# Altium PCB PowerDivider.PcbDoc
Units mil, origin at the board's own origin, x right, y up, seen from the top; angles counter-clockwise.
Board outline 1139.75 x 1980.03 mil, 4 copper layers (Top Layer, Layer 1, Layer 2, Bottom Layer), stack 23.756 mil thick; 8 components, 2 nets, 31 pads, 131 vias.
Unrouted connection lines stored in the file: 8.
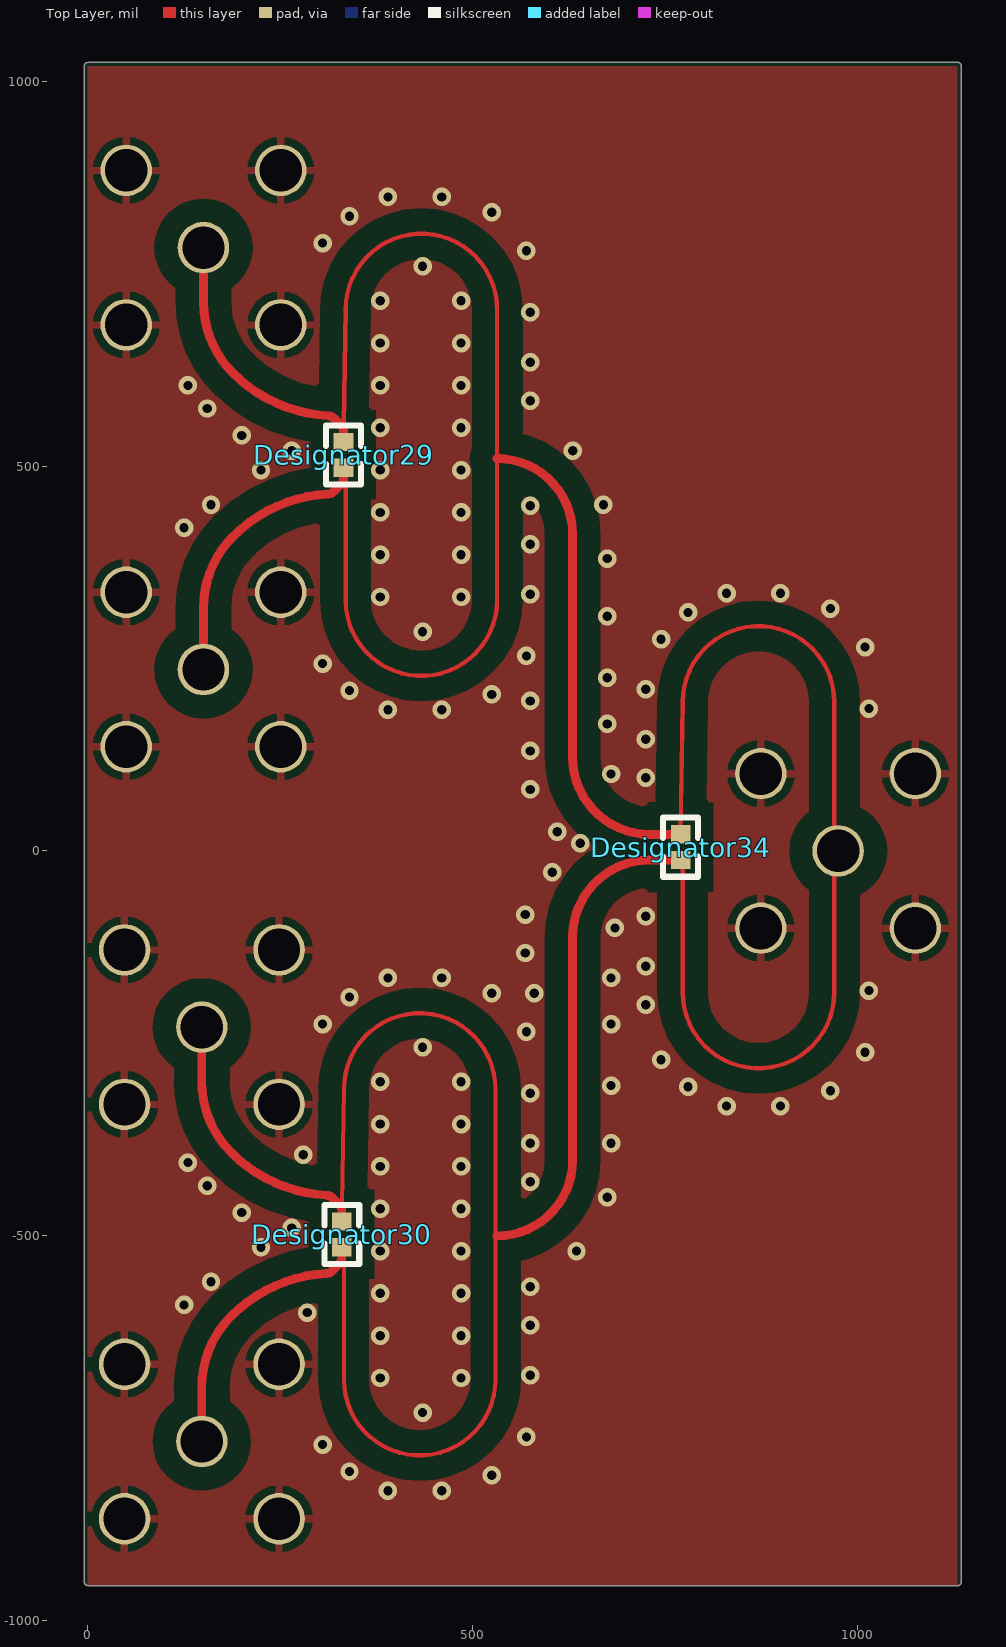
[diagram p0: Top Layer view]
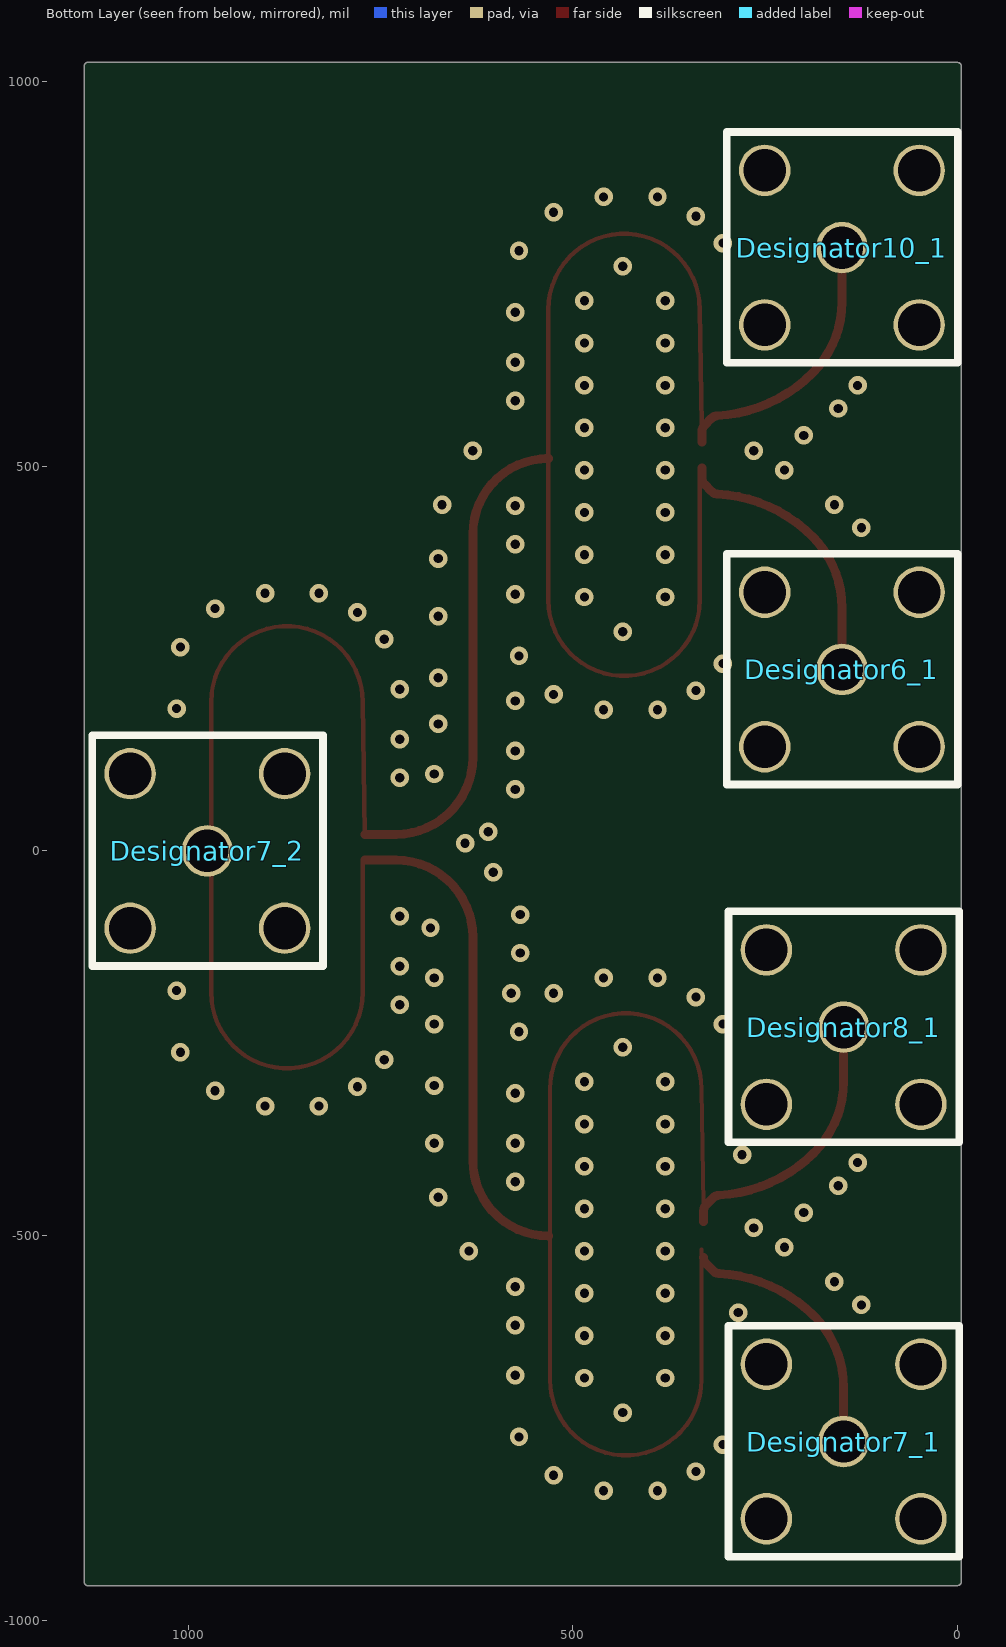
[diagram p1: Bottom Layer view, seen from below]
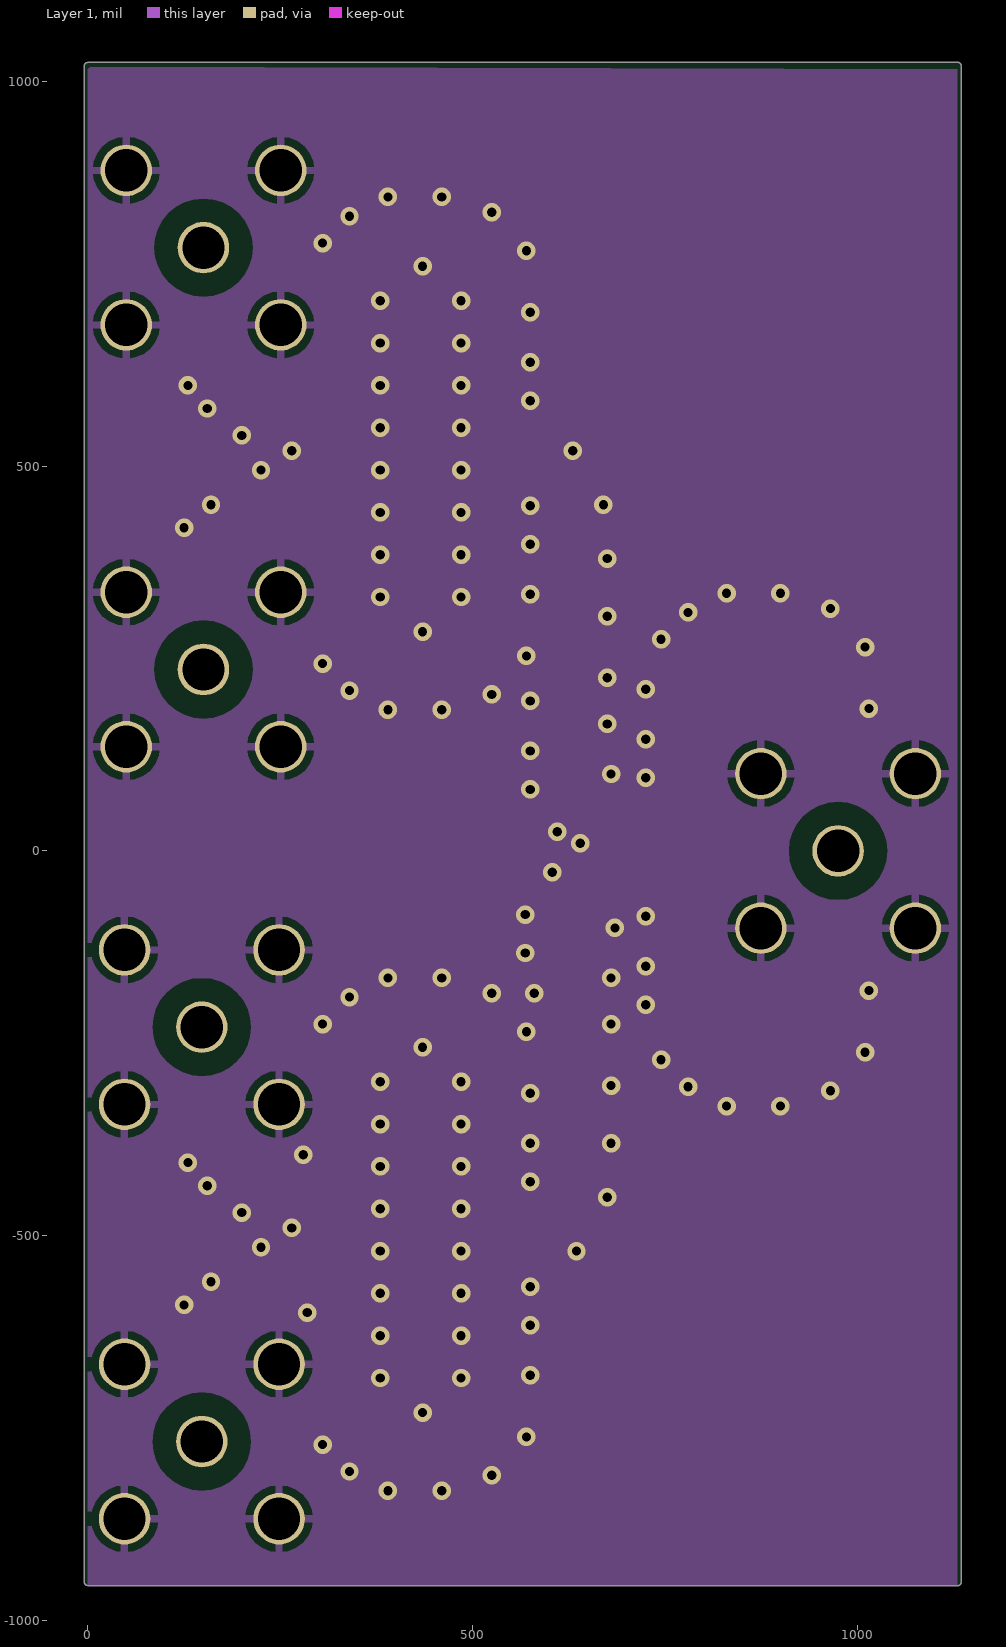
[diagram p2: Layer 1]
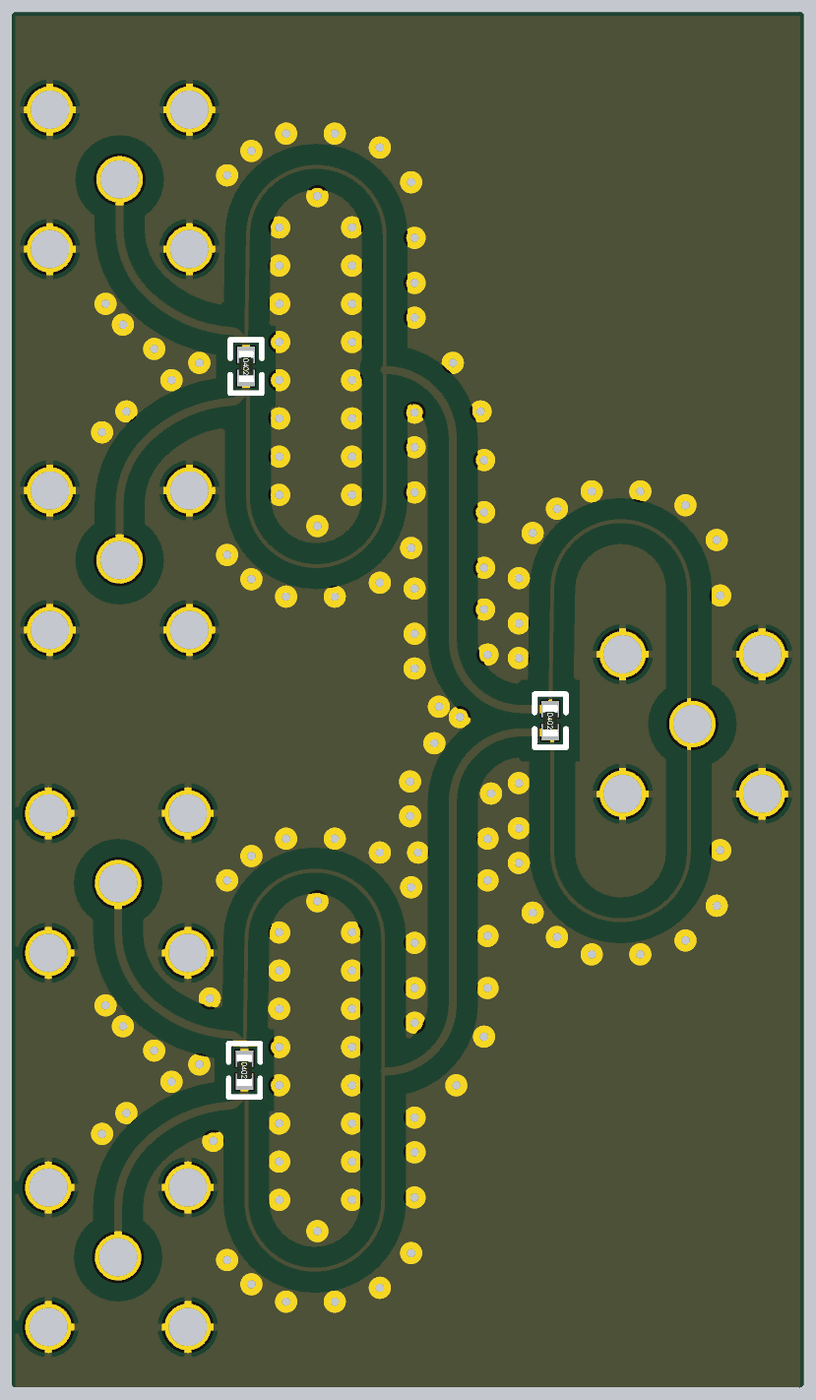
[diagram p3: 3D render of the assembled board from above, using the file's embedded part models]

## Layer stack, top to bottom
Top Solder: solder mask 0.4, Solder Resist, Dk 3.5
Top Layer: signal copper 1.4
Dielectric 2: prepreg 2.8, PP-006, Dk 4.1
Layer 1: signal copper 1.378
Dielectric 1: dielectric 12.6, FR-4, Dk 4.8
Layer 2: signal copper 1.378
Dielectric 3: prepreg 2.8, PP-006, Dk 4.1
Bottom Layer: signal copper 1.4
Bottom Solder: solder mask 0.4, Solder Resist, Dk 3.5

## Board outline
-4.68,-949.25 cw(c0,-948.5) -4.74,-948.5 -4.74,1020 cw(c0,1020) 0,1024.74 1128.36,1024.74 cw(c1130,1020) 1135.02,1020 1135.02,-950 cw(c1130,-950) 1128.36,-954.74 0,-954.74 cw(c0,-950)

## Design rules (kind name [scope] priority, off if disabled: settings)
Clearance [All] p1: gap=30 ignorepadtopadclearanceinfootprint=FALSE except(5: Arc-Arc Arc-Track Arc-SMDPad Arc-THPad Arc-Via Arc-Text Arc-Hole Track-Track Track-SMDPad Track-THPad Track-Via Track-Text Track-Hole SMDPad-SMDPad SMDPad-THPad SMDPad-Via SMDPad-Text SMDPad-Hole THPad-THPad THPad-Via THPad-Text THPad-Hole Via-Via Via-Text Via-Hole Text-Text Text-Hole)
PlaneConnect [All] p1: pad.planeconnectstyle=Relief pad.reliefexpansion=20 pad.reliefentries=4 pad.reliefconductorwidth=10 pad.reliefairgap=10 via.planeconnectstyle=Direct via.reliefexpansion=20 via.reliefentries=4 via.reliefconductorwidth=10 via.reliefairgap=10
PolygonConnect [All] p1: thpad.connectstyle=Relief thpad.reliefconductorwidth=10 thpad.reliefentries=4 thpad.polygonreliefangle="90 Angle" thpad.airgapwidth=10 smdpad.connectstyle=Direct smdpad.reliefconductorwidth=10 smdpad.reliefentries=4 smdpad.polygonreliefangle="90 Angle" smdpad.airgapwidth=10 via.connectstyle=Direct via.reliefconductorwidth=10 via.reliefentries=4 via.polygonreliefangle="90 Angle" via.airgapwidth=10
RoutingVias [All] p1: holewidth=12 width=24 viastyle="Through Hole" minholewidth=12 minwidth=24 maxholewidth=12 maxwidth=24
SolderMaskExpansion [All] p1: expansion=4 istentingtop=FALSE
Width [All] p1: maxlimit=100 minlimit=5 preferedwidth=11.55
29 further rules are at their usual default settings.

## Components (designator, comment, footprint, x,y, rotation, side; value= is the part's Value field where it differs from the comment)
Designator6_1 "Comment" SMA-KHD 49.84,336.21 r0 bottom
Designator7_1 "Comment" SMA-KHD 47.64,-667.16 r0 bottom
Designator7_2 "Comment" SMA-KHD 874.61,100.39 r0 bottom
Designator8_1 "Comment" SMA-KHD 47.64,-128.59 r0 bottom
Designator10_1 "Comment" SMA-KHD 49.84,884.47 r0 bottom
Designator29 "Comment" 0402_R 332.2,514.8 r270 top
Designator30 "Comment" 0402_R 330,-498.27 r270 top
Designator34 "Comment" 0402_R 770.35,4.85 r270 top

## Footprints (in the part's own frame and the unit in brackets; to place one, negate y for a bottom-side part, rotate by r counter-clockwise, add the part's x,y. Pads: shape width x height; smd on the part's side, far side on the other; paste and mask are expansions set on the pad)
0402_R [mm]
  rect 0.6x0.65 smd mask+0.051: 1(-0.425,0) 2(0.425,0)
  silkscreen extent -0.97,-0.58 0.97,0.58, body extent -0.57,-0.27 0.58,0.28, height 0.41
SMA-KHD [mm] "正插SMA射频连接器"
  round 1.7 hole 1.4: 0(0,0) 0(0,5.1) 0(5.1,0) 0(5.1,5.1) 1(2.55,2.55)
  silkscreen extent -1.27,-1.27 6.35,6.35

## Via types
v1: diameter 24, hole 12, Top Layer to Bottom Layer, 131 vias

## Nets (pads, with @x,y where several pads share a name; then routed paths per layer and width w, separated by ;. In a path a pad name is that pad's centre, name@x,y a point inside that pad or via, vN(x,y) a via of type N, cw(c..) or ccw(c..) an arc to the next point about the centre after c; other vN are vias at no path point)
GND: Designator6_1.0 Designator7_1.0 Designator7_2.0 Designator8_1.0 Designator10_1.0
  other v1: 390,-831.54 460,-831.54 525,-811.54 340,-806.54 305,-771.54 570,-761.54 435,-730 380,-685 485,-685 575,-681.54 380,-630 485,-630 575,-616.54 285,-600 125,-590 380,-575 485,-575 575,-566.54 160,-560 380,-520 485,-520 635,-520 225,-515 265,-490 200,-470 380,-465 485,-465 675,-450 155,-435 575,-430 380,-410 485,-410 130,-405 280,-395 575,-380 680,-380 380,-355 485,-355 830,-331.54 900,-331.54 575,-315 965,-311.54 780,-306.54 680,-305 380,-300 485,-300 745,-271.54 1010,-261.54 435,-255 570,-235 305,-225 680,-225 725,-200 340,-190 525,-185 580,-185 1015,-181.54 390,-165 460,-165 680,-165 725,-150 568.49,-132.66 685,-100 725,-85 568.49,-82.66 603.49,-27.66 640,10 610,25 575,80 725,95 680,100 575,130 725,145 675,165 390,183.46 460,183.46 1015,185 575,195 525,203.46 340,208.46 725,210 675,225 305,243.46 570,253.46 1010,265 745,275 435,285 675,305 780,310 965,315 380,330 485,330 575,333.46 830,335 900,335 675,380 380,385 485,385 575,398.46 125,420 380,440 485,440 575,448.46 160,450 670,450 225,495 380,495 485,495 265,520 630,520 200,540 380,550 485,550 155,575 575,585 130,605 380,605 485,605 575,635 380,660 485,660 575,700 380,715 485,715 435,760 570,780 305,790 340,825 525,830 390,850 460,850
RF: Designator6_1.1 Designator7_1.1 Designator7_2.1 Designator8_1.1 Designator10_1.1 Designator29.1 Designator29.2 Designator30.1 Designator30.2 Designator34.1 Designator34.2 | length 6682.5
  Top Layer w5.5: Designator30.1 330.22,-467.92 ; 330.35,-459.81 332.8,-309.31 cw(c431.22,-309.31) 529.65,-309.31 529.65,-500.26 529.65,-687.21 cw(c431.22,-687.21) 332.8,-687.21 ; Designator29.1 332.42,545.14 ; 332.56,553.25 335,703.75 cw(c433.43,703.75) 531.85,703.75 531.85,509.95 531.85,325.85 cw(c433.43,325.85) 335,325.85 ; Designator34.1 773.15,193.8 cw(c871.57,193.8) 970,193.8 970,0 970,-184.1 cw(c871.57,-184.1) 773.15,-184.1
  Top Layer w5.7: 332.8,-687.21 332.8,-528.61 Designator30.2@332.8,-518.06 ; 335,325.85 335,479.66 335,484.45 ; 773.15,-184.1 Designator34.2@773.15,-14.95
  Top Layer w11.55: Designator7_1.1 148.03,-696.97 cw(c278.75,-696.97) 186.28,-604.58 cw(c321.1,-739.32) 310.24,-549.02 ccw(c309.58,-537.49) 317.74,-545.65 326.62,-536.78 ccw(c318.45,-528.61) 330,-528.61 ; Designator8_1.1 148.03,-299.57 ccw(c278.75,-299.57) 186.28,-391.96 ccw(c321.1,-257.22) 310.24,-447.52 cw(c309.58,-459.05) 317.74,-450.88 326.62,-459.75 cw(c318.45,-467.92) 330,-467.92 Designator30.1 ; Designator6_1.1@150.24,245.51 150.24,316.1 cw(c280.95,316.1) 188.48,408.49 cw(c323.3,273.74) 312.44,464.04 ccw(c311.78,475.58) 319.95,467.41 328.82,476.28 ccw(c320.65,484.45) 332.2,484.45 Designator29.2 ; Designator10_1.1 150.24,713.49 ccw(c280.95,713.49) 188.48,621.1 ccw(c323.3,755.85) 312.44,565.55 cw(c311.78,554.01) 319.95,562.18 328.82,553.31 cw(c320.65,545.14) 332.2,545.14 Designator29.1 ; 531.85,-500.26 ccw(c531.85,-402.11) 630,-402.11 630,-111.89 cw(c730,-111.89) 730,-11.89 Designator34.2 ; 535,509.95 531.85,509.95 cw(c531.85,411.8) 630,411.8 630,121.58 ccw(c730,121.58) 730,21.58 Designator34.1

## Polygon pours and split planes (outlines as drawn)
GND on Layer 1 "GND_L02_P000" (solid, pour order 0): 0,1019.35 0,-954.74 1130,-954.74 1130,1015.68
GND on Top Layer "GND_L01_P001" (solid, pour order 1): 0,1020 0,-954.74 1130,-954.74 1130,1020

## Silkscreen, mask and mechanical layers (free items; w line width, h text height)
Mechanical 1:
  lines w9.45: 0,-950 1130,-950 ; 0,-948.5 0,1020 1130,1020
  lines w10: 1130,-950 1130,1020